# Altium PCB MASTER.PcbDoc
Units mil, origin at the board's own origin, x right, y up, seen from the top; angles counter-clockwise.
Board outline 2775.59 x 6929.09 mil, 2 copper layers (Top Layer, Bottom Layer); 51 components, 44 nets, 216 pads, 70 vias.
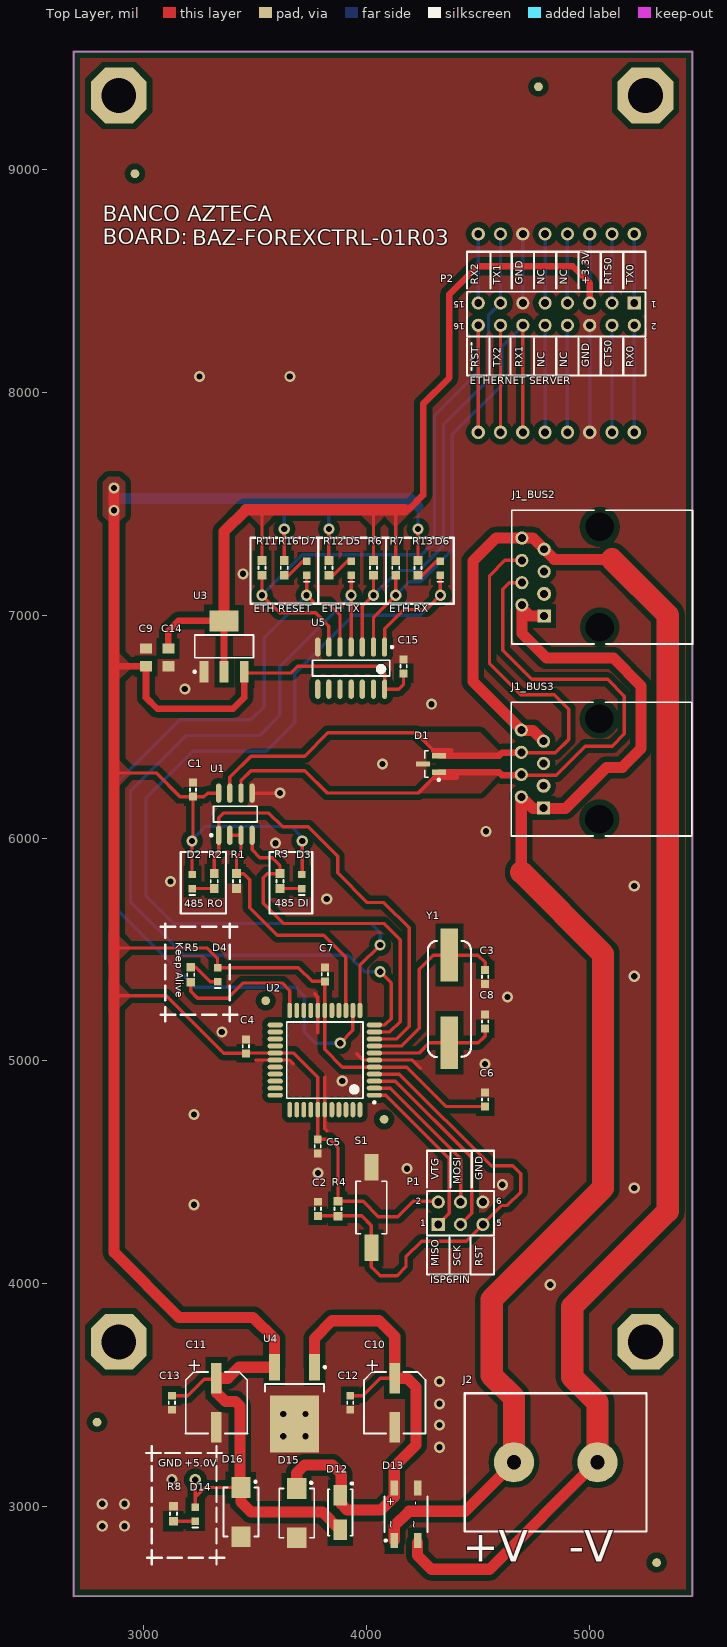
[diagram p0: Top Layer view]
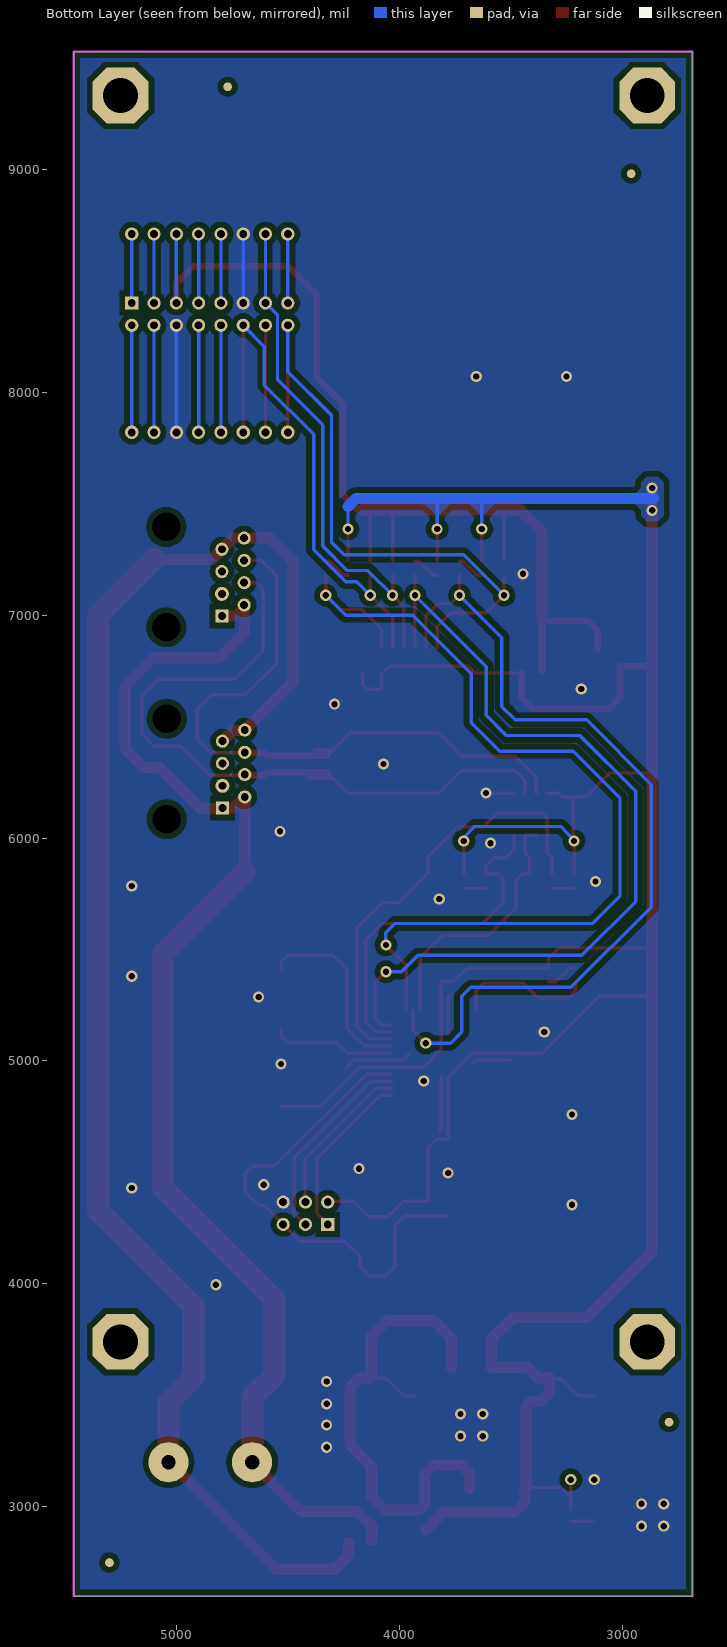
[diagram p1: Bottom Layer view, seen from below]

## Layer stack, top to bottom
Top Layer: signal copper 1.4
Dielectric: dielectric 12.6, FR-4, Dk 4.8
Bottom Layer: signal copper 1.4

## Board outline
2685.08,2598.47 2685.08,9527.56 5460.67,9527.56 5460.67,2599.94

## Design rules (kind name [scope] priority, off if disabled: settings)
Clearance [All] p1: gap=25
ComponentClearance [All] p1: gap=10 collisioncheckmode=3 verticalgap=10
PlaneConnect [All] p1: planeconnectstyle=Direct reliefexpansion=20 reliefentries=4 reliefconductorwidth=10 reliefairgap=10
PolygonConnect [All] p1: connectstyle=Direct reliefconductorwidth=10 reliefentries=4 polygonreliefangle="90 Angle"
RoomDefinition TCPIP [InComponentClass('TCPIP')] p1: confinementstyle=ConfineIn formatcopy=TRUE lockcomponents=FALSE outline 0,0 2000,0 2000,1000 0,1000
RoomDefinition SUPPLY [InComponentClass('SUPPLY')] p2: confinementstyle=ConfineIn formatcopy=TRUE lockcomponents=FALSE outline 0,0 2000,0 2000,1000 0,1000
RoomDefinition POWER [InComponentClass('POWER')] p3: confinementstyle=ConfineIn formatcopy=TRUE lockcomponents=FALSE outline 0,0 2000,0 2000,1000 0,1000
RoomDefinition CPU [InComponentClass('CPU')] p4: confinementstyle=ConfineIn formatcopy=TRUE lockcomponents=FALSE outline 0,0 2000,0 2000,1000 0,1000
RoomDefinition COM485 [InComponentClass('COM485')] p5: confinementstyle=ConfineIn formatcopy=TRUE lockcomponents=FALSE outline 0,0 2000,0 2000,1000 0,1000
RoomDefinition BUS3 [InComponentClass('BUS3')] p6: confinementstyle=ConfineIn formatcopy=TRUE lockcomponents=FALSE outline 0,0 2000,0 2000,1000 0,1000
RoomDefinition BUS2 [InComponentClass('BUS2')] p7: confinementstyle=ConfineIn formatcopy=TRUE lockcomponents=FALSE outline 0,0 2000,0 2000,1000 0,1000
RoutingVias [All] p1: holewidth=28 width=50 viastyle="Through Hole" minholewidth=28 minwidth=50 maxholewidth=28 maxwidth=50
SolderMaskExpansion [All] p1: expansion=4
TestPointUsage [All] p1: valid=0 allowmultiple=FALSE
Testpoint [All] p1: side=15 testpointundercomponent=TRUE minsize=40 maxsize=100 preferedsize=60 minholesize=0 maxholesize=40 preferedholesize=32 testpointgrid=1 style=1023 order=0-112345678
Width [All] p1: maxlimit=100 minlimit=15 preferedwidth=25
17 further rules are at their usual default settings.

## Classes and differential pairs
component class POWER: J2
component class BUS2: J1_BUS2
component class BUS3: J1_BUS3
component class COM485: C1 D1 D2 D3 R1 R2 R3 U1
component class CPU: C2 C3 C4 C5 C6 C7 C8 D4 P1 R4 R5 S1 U2 Y1
component class SUPPLY: C10 C11 C12 C13 D12 D13 D14 D15 D16 R8 U4
component class TCPIP: C9 C14 C15 D5 D6 D7 P2 R6 R7 R11 R12 R13 R16 U3 U5
channel class BUSConnector: BUS2 BUS3

## Components (designator, comment, footprint, x,y, rotation, side; value= is the part's Value field where it differs from the comment)
C1 "CAP0.1uF" CAP0603 3220.71,6217.05 r90 top
C2 "CAP0.1uF" CAP0603 3780.71,4337.05 r90 top
C3 "CAP18pF" CAP0603 4530.71,5377.05 r270 top
C4 "CAP0.1uF" CAP0603 3457.64,5065.67 r90 top
C5 "CAP0.1uF" CAP0603 3780.31,4617.05 r270 top
C6 "CAP0.1uF" CAP0603 4530.71,4827.05 r90 top
C7 "CAP0.1uF" CAP0603 3811.81,5388.54 r90 top
C8 "CAP18pF" CAP0603 4530.71,5177.05 r90 top
C9 "CAP10uF" CAP0805 3010,6810 r90 top
C10 "CAP100uF" EEH-ZA1E101XP 4125.71,3467.05 r270 top
C11 "CAP47uF" EEH-ZA1E101XP 3325.71,3467.05 r270 top
C12 "CAP0.1uF" CAP0603 3925.71,3467.05 r270 top
C13 "CAP0.1uF" CAP0603 3125.71,3467.05 r270 top
C14 "CAP22uF" CAP0805 3110,6810 r270 top
C15 "CAP0.1uF" CAP0603 4165,6770 r90 top
D1 "SM712-02HTG" SW712 4287.87,6332.05 r180 top
D2 "LEDY" 150060YS75000 3217.68,5805.08 r90 top
D3 "LEDY" 150060YS75000 3708.74,5805.08 r90 top
D4 "LEDY" 150060YS75000 3330.71,5387.05 r90 top
D5 "LEDY" 150060YS75000 3930,7210.16 r90 top
D6 "LEDY" 150060YS75000 4330,7210.16 r90 top
D7 "LEDY" 150060YS75000 3730,7210.16 r90 top
D12 "S1M-E3/5AT" S1M-E3/5AT 3880.71,2974.8 r270 top
D13 "MB6S-E3/80" MB6S-E3/80 4175.71,2967.05 r90 top
D14 "LEDY" 150060YS75000 3230.71,2967.05 r90 top
D15 "TVS12V" SMBJ5.0A 3685.71,2972.05 r270 top
D16 "TVS5.0V" SMBJ5.0A 3435.71,2976.81 r270 top
J1_BUS2 "RJ45" 15-43-6233 5460.71,7170.43 r90 top (schematic designator J1)
J1_BUS3 "RJ45" 15-43-6233 5458.17,6309.55 r90 top (schematic designator J1)
J2 "NC6-P107-02" BARRIER2POS 4660,3200 r0 top
P1 "ISP" HDR2X3 4320.71,4267.05 r0 top
P2 "826925-8" HDR2X8 5200,8400 r180 top
R1 "RES4.7K" RES0603 3415.71,5807.05 r270 top
R2 "RES4.7K" RES0603 3315.71,5807.05 r90 top
R3 "RES4.7K" RES0603 3610.71,5807.05 r90 top
R4 "RES4.7K" RES0603 3870.71,4337.05 r90 top
R5 "RES4.7K" RES0603 3210.71,5387.05 r90 top
R6 "RES4.7K" RES0603 4030,7212.13 r270 top
R7 "RES4.7K" RES0603 4130,7212.13 r270 top
R8 "RES4.7K" RES0603 3132.68,2969.01 r90 top
R11 "RES4.7K" RES0603 3530,7212.13 r270 top
R12 "RES4.7K" RES0603 3830,7211.87 r270 top
R13 "RES4.7K" RES0603 4230,7212.13 r270 top
R16 "RES4.7K" RES0603 3630,7212.13 r270 top
S1 "SW-PB" microswitch 4020.71,4342.76 r90 top
U1 "MAX485CSA" NSO8_N 3410.71,6107.05 r90 top
U2 "ATmega1284P-AU" 44A_N 3811.81,5004.09 r180 top
U3 "AZ1117H-3.3TRE1" AZ1117H-3.3TRE1 3360,6860 r90 top
U4 "MC7805CDTRKG" MC7805CDTRKG 3675.71,3467.05 r270 top
U5 "SN7407DR" SOIC14 3930,6762.13 r270 top
Y1 "XTAL" Crystal20MHz 4370.71,5278.9 r90 top

## Footprints (in the part's own frame and the unit in brackets; to place one, negate y for a bottom-side part, rotate by r counter-clockwise, add the part's x,y. Pads: shape width x height; smd on the part's side, far side on the other; paste and mask are expansions set on the pad)
15-43-6233 [mm] "Connector; PCB Jack, Thru-Hole; 1-Port; Unshielded without Lightpipes; Right Angle"
  rect 1.5x1.5 hole 0.9: 1(-4.445,16.89)
  round 1.5 hole 0.9: 2(-3.175,19.43) 4(-0.635,19.43) 5(0.635,16.89) 6(1.905,19.43) 7(3.175,16.89) 8(4.445,19.43)
  round 1.6 hole 0.9: 3(-1.905,16.89)
  round 2.95 hole 3.25 unplated: MH1(-5.715,10.54) MH2(5.715,10.54)
  silkscreen extent -7.62,0 7.62,20.58
44A_N [mm] "Thin QFP, 44-Leads, Body 10x10mm, Pitch 0.8mm, IPC Medium Density"
  oval 1.75x0.55 smd: 1(-5.65,4) 2(-5.65,3.2) 3(-5.65,2.4) 4(-5.65,1.6) 5(-5.65,0.8) 6(-5.65,0) 7(-5.65,-0.8) 8(-5.65,-1.6) 9(-5.65,-2.4) 10(-5.65,-3.2) 11(-5.65,-4) 23(5.65,-4) 24(5.65,-3.2) 25(5.65,-2.4) 26(5.65,-1.6) 27(5.65,-0.8) 28(5.65,0) 29(5.65,0.8) 30(5.65,1.6) 31(5.65,2.4) 32(5.65,3.2) 33(5.65,4)
  oval 0.55x1.75 smd: 12(-4,-5.65) 13(-3.2,-5.65) 14(-2.4,-5.65) 15(-1.6,-5.65) 16(-0.8,-5.65) 17(0,-5.65) 18(0.8,-5.65) 19(1.6,-5.65) 20(2.4,-5.65) 21(3.2,-5.65) 22(4,-5.65) 34(4,5.65) 35(3.2,5.65) 36(2.4,5.65) 37(1.6,5.65) 38(0.8,5.65) 39(0,5.65) 40(-0.8,5.65) 41(-1.6,5.65) 42(-2.4,5.65) 43(-3.2,5.65) 44(-4,5.65)
  silkscreen extent -5.77,-4.35 4.35,4.95, body extent -5,-5 5,5, height 1.2
150060YS75000 [mm]
  rect 0.85x0.85 smd: 1(-0.8,0) 2(0.8,0)
  silkscreen extent -1.53,-0.33 -1.53,0.33, body extent -0.85,-0.45 0.85,0.45, height 2.44
AZ1117H-3.3TRE1 [mm] "Reguladores de tensión lineal LDO BJT HiCurr 3.3V at 1A"
  rect 2.4x1 smd: 1(-2.9,2.3) 2(-2.9,0) 3(-2.9,-2.3)
  rect 2.4x3.3 smd: 4(2.9,0)
  silkscreen extent -3.02,-3.35 1.3,3.47, body extent -1.85,-3.35 1.85,3.35, height 1.8
BARRIER2POS [mil]
  round 180 hole 63.94: 1(0,0) 2(375,0)
  silkscreen extent -220,-310 595,310
CAP0603 [mm] "Capacitores cerámicos de capas múltiples (MLCC) - SMD/SMT 0603 0.1uF 16volts X7R 5%"
  rect 0.9x0.9 smd: 1(-0.8,0) 2(0.8,0)
  silkscreen extent -0.15,-0.35 0.15,0.35, body extent -0.83,-0.43 0.82,0.42, height 0.85
CAP0805 [mm]
  rect 1.15x1.35 smd: 1(-1,0) 2(1,0)
  body extent -1,-0.63 1,0.63, height 4.57
Crystal20MHz [mm]
  rect 6x2 smd: 1(-5,0) 2(5,0)
  silkscreen extent -6.64,-2.45 6.6,2.45, body extent -6.6,-2.4 6.6,2.4, height 4.3
EEH-ZA1E101XP [mm] "EEH-ZA1E101XP"
  rect 3.5x1.2 smd: 1(-2.794,0) 2(2.794,0)
  silkscreen extent -3.5,-3.5 3.5,3.5
HDR2X3 [mm] "Connector; Header; 3x2 Position"
  rect 1.5x1.5 hole 0.9: 1(0,0)
  round 1.5 hole 0.9: 2(0,2.54) 3(2.54,0) 4(2.54,2.54) 5(5.08,0) 6(5.08,2.54)
  silkscreen extent -1.27,-1.27 6.35,3.81
HDR2X8 [mm] "Connector; Header; 8x2 Position"
  rect 1.5x1.5 hole 0.9: 1(0,0)
  round 1.5 hole 0.9: 2(0,2.54) 3(2.54,0) 4(2.54,2.54) 5(5.08,0) 6(5.08,2.54) 7(7.62,0) 8(7.62,2.54) 9(10.16,0) 10(10.16,2.54) 11(12.7,0) 12(12.7,2.54) 13(15.24,0) 14(15.24,2.54) 15(17.78,0) 16(17.78,2.54)
  silkscreen extent -1.27,-1.27 19.05,3.81
MB6S-E3/80 [mm] "MB6S-E3/80"
  rect 1.7x0.85 smd: 1(-3,1.335) 2(-3,-1.335) 3(3,-1.335) 4(3,1.335)
  silkscreen extent -3.12,-2.45 2.05,2.45, body extent -2.05,-2.47 2.05,2.48, height 2.9
MC7805CDTRKG [mm] "MC7805CDTRKG"
  rect 3.05x1.25 smd: 1(-4.05,2.29) 3(-4.05,-2.29)
  rect 6.5x5.55 smd: 4(2.4,0)
  silkscreen extent -4.17,-3.35 -1.25,3.59, body extent -2.5,-3.37 3.72,3.37, height 2.38
microswitch [mm]
  rect 3x1.6 smd: 1(-4.59,0) 2(4.59,0)
  silkscreen extent -3,-1.75 3,1.75, body extent -3,-1.75 3,1.75, height 4.57
NSO8_N [mm] "SOIC, 8-Leads, Body 4.9x3.9mm, Pitch 1.27mm, IPC Medium Density"
  oval 2.2x0.6 smd: 1(-2.4,1.905) 2(-2.4,0.635) 3(-2.4,-0.635) 4(-2.4,-1.905) 5(2.4,-1.905) 6(2.4,-0.635) 7(2.4,0.635) 8(2.4,1.905)
  silkscreen extent -2.52,-2.5 0.9,2.88, body extent -1.95,-2.45 1.95,2.45, height 1.75
RES0603 [mm]
  rect 1x1 smd: 1(-0.85,0) 2(0.85,0)
  silkscreen extent -0.15,-0.4 0.15,0.4, body extent -0.9,-0.45 0.9,0.45, height 0.55
S1M-E3/5AT [mm] "S1M-E3/5AT"
  rect 2.35x1.55 smd: 1(-1.975,0) 2(1.975,0)
  silkscreen extent -3.42,-1.4 2.65,1.45, body extent -2.64,-1.4 2.64,1.39, height 2.29
SMBJ5.0A [mm]
  rect 2.35x2.2 smd: 1(-2.8,0) 2(2.8,0)
  silkscreen extent -3.57,-2 2.8,2, body extent -2.8,-1.97 2.79,1.97, height 2.44
SOIC14 [mm]
  oval 2.2x0.6 smd: 1(-2.4,3.81) 2(-2.4,2.54) 3(-2.4,1.27) 4(-2.4,0) 5(-2.4,-1.27) 6(-2.4,-2.54) 7(-2.4,-3.81) 8(2.4,-3.81) 9(2.4,-2.54) 10(2.4,-1.27) 11(2.4,0) 12(2.4,1.27) 13(2.4,2.54) 14(2.4,3.81)
  silkscreen extent -2.52,-4.4 0.9,4.79, body extent -2,-4.38 2,4.38, height 1.75
SW712 [mm] "SM712 Series 600W Asymmetrical TVS Diode Array"
  rect 1.6x0.6 smd: 1(-0.9,0.95) 2(-0.9,-0.95) 3(0.9,0)
  silkscreen extent -1.03,-1.5 0.7,1.92, body extent -0.7,-1.52 0.7,1.52, height 1.12

## Part data
C1 C2 C4 C5 C6 C7 C12 C13 C15: library part C0.1UF, "Capacitores cerámicos de capas múltiples (MLCC) - SMD/SMT 0603 0.1uF 16volts X7R 5%"
C3 C8: "Capacitores cerámicos de capas múltiples (MLCC) - SMD/SMT 0603 18pF 50volts C0G 5%"
C9: "Capacitores cerámicos de capas múltiples (MLCC) - SMD/SMT 0805 10uF 16volts X5R 10%"
C10: "Capacitores de polímero orgánico de aluminio 100uF 25volts 6.3x7.7mm"
C11: "Capacitores de polímero orgánico de aluminio 25volts 47uF ESR 30mohm"
C14: "Capacitores cerámicos de capas múltiples (MLCC) - SMD/SMT 0805 22uF 16volts X5R 20%"
D1: "Secuencias de diodos de TVS 600W 2 Channel Green Asymmetrical SOT23-3 (- 7 V to + 12 V)"
D2 D3 D4 D5 D6 D7 D14: "LED estándar - SMD (montaje superficial) WL-SMCW SMDMono TpVw Waterclr 0603 Yellow"
D12: "Rectificadores 1.0 Amp 1000 Volt 30A IFSM @ 8.3ms"
D13: "Rectificadores en puente 600 Volt 0.5 Amp 35 Amp IFSM"
D15: "Diodos TVS - Supresores de tensión transitoria 600W 12V 5% Uni"
D16: "Diodos TVS - Supresores de tensión transitoria 5Vr 600W 65.3A 5% UniDirectional"
J1_BUS2 J1_BUS3: library part 15-43-6233, "Conectores modulares / Conectores Ethernet 8 PCB LO PRO R/A"
J2: "Bloques de terminal de barrera DUAL .375\" 2P 12-22"
P1: library part "Header 3X2", "Alojamientos de cables y cabecera 2X03P DUAL ROW"
P2: library part "Header 8X2", "Alojamientos de cables y cabecera 2X08 POS VERT TIN"
R1 R2 R3 R4 R5 R6 R7 R8 R11 R12 R13 R16: "Resistores de película gruesa - SMD 1/10watt 4.7Kohms 1%"
S1: "Switch"
U1: "Low-Power, Slew-Rate-Limited RS-485/RS-422 Transceiver"
U2: "20 MHz 8-bit AVR Microcontroller with 128KB Flash, 44-Pin TQFP Pkg, Industrial Temp"
U3: "Reguladores de tensión lineal LDO BJT HiCurr 1.15V at 1A"
U4: "Reguladores de tensión lineal 5V 1A Postive"
U5: "Búfers y controladores de línea Hex Buffer/Driver"
Y1: "Cristales 20MHz 16pF -10C +70C"

## Free pads (board coordinates)
  oct 250x250 hole 156.25: 0(2887.8,3740.16) 0(2887.8,9330.71) 0(5250,3740.16) 0(5250,9330.71)
  round 39.37 smd mask+39.37: 1(2790,3380) 1(2960,8980) 1(4770,9370) 1(5300,2750)
  round 39.37 smd far side mask+39.37: 1(2790,3380) 1(2960,8980) 1(4770,9370) 1(5300,2750)
  round 39.37 smd mask+29.53: 1(3546.69,5270.04) 1(4077.72,4738.03)

## Via types
v1: diameter 50, hole 28, Top Layer to Bottom Layer, 54 vias
v2: diameter 59.05, hole 35.43, Top Layer to Bottom Layer, 16 vias

## Nets (pads, with @x,y where several pads share a name; then routed paths per layer and width w, separated by ;. In a path a pad name is that pad's centre, name@x,y a point inside that pad or via, vN(x,y) a via of type N, cw(c..) or ccw(c..) an arc to the next point about the centre after c; other vN are vias at no path point)
20MHZ_1: C3.1 U2.8 Y1.2 | length 866.9
  Top Layer w15: U2.8 4155.75,5067.09 4235.71,5147.05 4235.71,5412.05 4297.56,5473.9 4498.86,5473.9 4530.71,5442.05 C3.1
20MHZ_2: C8.1 U2.7 Y1.1 | length 561.6
  Top Layer w15: U2.7 4234.25,5035.59 4280.71,5082.05 Y1.1 4500.71,5082.05 4530.71,5112.05 C8.1
+3.3V: C14.1 P2.5 R6.1 R7.1 R11.1 U3.2 U3.4 | length 4677
  Top Layer w15: R11.1 3530,7472.43 ; R6.1 4030,7472.43 ; R7.1 4130,7472.43
  Top Layer w30: C14.1 3110,6930 3154.17,6974.17 U3.4 U3.2 ; 4169,7475 4190,7475 4253,7538 4253,7947 4370.08,8064.08 4370.08,8438.08 4497,8565 4924,8565 5000,8489 P2.5
  Top Layer w50: U3.4 3360,7375 3457.43,7472.43 4166.43,7472.43
  Bottom Layer w15: P2.5 v2(5000,8710)
A: D1.1 J1_BUS2.4 J1_BUS3.4 U1.6 | length 3210.3
  Top Layer w15: U1.6 3435.71,6257.05 3480.71,6302.05 3722.87,6302.05 3822.87,6202.05 4230.71,6202.05 D1.1 ; J1_BUS2.4@4683.54,7145.43 4639.09,7145.43 4610.71,7117.05 4610.71,6842.05 4740.71,6712.05 5080.71,6712.05 5155.71,6637.05 5155.71,6467.05 5100.71,6412.05 4980.71,6412.05 4850.71,6282.05 J1_BUS3.4@4693.64,6282.05
  Top Layer w25: 4305.71,6272.04 4400.71,6272.04
  Top Layer w30: D1.1 4593.15,6294.65 4605.75,6282.05 J1_BUS3.4@4693.64,6282.05
B: D1.2 J1_BUS2.6 J1_BUS3.6 U1.7 | length 2920
  Top Layer w15: U1.7 3385.71,6272.05 3480.71,6367.05 3720.71,6367.05 3825.71,6472.05 4220.71,6472.05 4300.71,6392.05 ; J1_BUS2.6@4683.54,7245.43 4619.09,7245.43 4550.71,7177.05 4550.71,6782.05 4690.71,6642.05 4840.71,6642.05 4905.71,6577.05 4905.71,6442.05 4845.71,6382.05 J1_BUS3.6@4695.75,6382.05
  Top Layer w25: 4300.71,6392.05 4375.71,6392.05
  Top Layer w30: D1.2 4593.11,6369.45 4605.71,6382.05 J1_BUS3.6@4695.75,6382.05
COM_485_EN: R1.1 U1.2 U1.3 U2.14 | length 1187.1
  Top Layer w15: U1.2 U1.3 3435.71,5932.05 3415.71,5912.05 R1.1 3447.24,5840.51 3475,5812.76 3475,5687.76 3598.76,5564 3806,5564 3905.71,5464.29 U2.14@3905.71,5226.54
DI: R3.2 U1.4 U2.10 | length 1637.4
  Top Layer w15: U1.4 3485.71,5947.05 3520.71,5912.05 3575.71,5912.05 3610.71,5877.05 R3.2 3554.17,5840.51 3535.71,5822.05 3535.71,5707.05 3625.71,5617.05 4075.71,5617.05 4150,5542.76 4150,5176.34 4103.74,5130.08 U2.10
GND: C1.2 C2.2 C3.2 C4.2 C5.2 C6.2 C7.2 C8.2 C9.2 C10.2 C11.2 C12.2 C13.2 C14.2 C15.2 D1.3 D13.3 D15.2 D16.2 P1.6 P2.6 P2.11 R1.2 R8.2 S1.2 U1.5 U2.6 U2.18 U2.28 U2.39 U3.1 U4.4 U5.7 | length 1829.4
  Top Layer w15: U1.5 v1@3610.71,6201.54 ; 3500.71,5004.1 3653.66,5004.1 3670.71,4987.05 ; 3765.71,5302.05 3779.91,5287.84 3779.91,5126.25 ; 3811.81,4927.05 3811.81,4695.95 3820.71,4687.05 ; 3955.71,5032.05 3983.66,5004.1 4203.66,5004.1 4240.71,4967.05
  Bottom Layer w15: P2.11 v2(4700,8710) ; v2(5000,7820) P2.6
  other v1: 2813.39,2913.39 2913.39,2913.39 2813.39,3013.39 2913.39,3013.39 3125.71,3122.05 4325.71,3267.05 3625.71,3317.05 3725.71,3317.05 4325.71,3367.05 3625.71,3417.05 3725.71,3417.05 4325.71,3462.05 4325.71,3562.05 4822.83,3996.06 3225,4355 5200,4430 4608.11,4444.61 3780.71,4497.05 4180.71,4517.05 3225,4760 3890,4910 4530.71,4987.05 3350,5130 4630.71,5287.05 5200,5380 3820.71,5727.05 5200,5785 3120,5805 3590.71,5977.05 4535,6030 3610.71,6202.05 4070.71,6332.05 4290,6600.51 3184,6668 3445,7185 3250,8070 3655,8070
IND: R5.1 U2.22 | length 629.1
  Top Layer w15: R5.1 3210.71,5312.05 3240.71,5282.05 3377.05,5282.05 3445,5350 3620,5350 3654.33,5315.67 U2.22
MISO: P1.4 U2.2 | length 715.4
  Top Layer w15: U2.2 4104.64,4878.11 4422.28,4560.47 P1.4@4422.28,4364.69
MOSI: P1.1 U2.1 | length 770
  Top Layer w15: U2.1 4086.14,4846.62 4370.71,4562.05 4370.71,4317.05 P1.1
NetD2_1: D2.1 R2.1 | length 98
  Top Layer w15: D2.1 R2.1
NetD3_1: D3.1 R3.1 | length 98
  Top Layer w15: R3.1 D3.1
NetD4_1: D4.1 R5.2 | length 146.9
  Top Layer w15: R5.2 3232.24,5420.51 3297.2,5355.55 D4.1
NetD5_2: D5.2 R12.2 | length 126.1
  Top Layer w15: R12.2 3849.66,7178.41 3912.65,7241.4 D5.2@3930,7241.4
NetD6_2: D6.2 R13.2 | length 126.1
  Top Layer w15: R13.2 4249.66,7178.66 4312.65,7241.65 D6.2
NetD7_2: D7.2 R16.2 | length 126.1
  Top Layer w15: R16.2 3649.66,7178.66 3712.65,7241.65 D7.2
NetD14_1: D14.1 R8.1 | length 98
  Top Layer w15: R8.1 D14.1
NetP2_3: P2.3 | length 310
  Bottom Layer w15: P2.3 v2(5100,8710)
NetP2_4: P2.4 | length 480
  Bottom Layer w15: v2(5100,7820) P2.4
NetP2_7: P2.7 | length 310
  Bottom Layer w15: P2.7 v2(4900,8710)
NetP2_8: P2.8 | length 480
  Bottom Layer w15: v2(4900,7820) P2.8
NetP2_9: P2.9 | length 310
  Bottom Layer w15: P2.9 v2(4800,8710)
NetP2_10: P2.10 | length 480
  Bottom Layer w15: v2(4800,7820) P2.10
NetP2_14: P2.14 | length 480
  Top Layer w15: v2(4600,7820) P2.14
NetP2_15: P2.15 | length 310
  Bottom Layer w15: P2.15 v2(4500,8710)
PIN_A: U2.30
PIN_B: U2.31
PIN_C: U2.32
PIN_D: U2.33
POWER_OUT: C10.1 C12.1 D12.1 D13.4 D15.1 U4.1 | length 2319.2
  Top Layer w15: C12.1 3982.2,3498.54 4060.71,3577.05 C10.1
  Top Layer w50: D15.1 3685.71,3152.05 3720.71,3187.05 3845.71,3187.05 3885.71,3147.05 3885.71,3012.05 3912.2,2985.55 4064.21,2985.55 4123.15,3044.49 4123.15,3179.49 4220.71,3277.05 4220.71,3537.05 4180.71,3577.05 C10.1 ; U4.1 3765.83,3755.76 3845.02,3835 4055,3835 4125.71,3764.29 C10.1@4125.71,3582.05
POWER_V+: D13.1 J1_BUS2.1 J1_BUS2.2 J1_BUS3.1 J1_BUS3.2 J2.1 | length 5928.3
  Top Layer w50: D13.1@4123.15,2848.94 4123.15,2913.15 4190,2980 4440,2980 J2.1 ; 4693.21,5846.79 J1_BUS3.2 ; J1_BUS3.2@4695.71,6182.05 4745.71,6132.05 4890.71,6132.05 5075.71,6317.05 5145.71,6317.05 5230.71,6402.05 5230.71,6682.05 5105.71,6807.05 4805.71,6807.05 4695.75,6917.01 J1_BUS2.2 ; J1_BUS2.2@4695.75,7032.01 4732.32,6995.43 J1_BUS2.1
  Top Layer w100: J2.1 4660,3489.61 4560,3589.61 4560,3930 5060,4430 5060,5480 4693.21,5846.79
POWER_V-: D13.2 J1_BUS2.7 J1_BUS2.8 J1_BUS3.7 J1_BUS3.8 J2.2 | length 7144.8
  Top Layer w50: D13.2@4228.27,2838.94 4228.27,2781.73 4290,2720 4550,2720 J2.2@5032.5,3202.5 ; J1_BUS2.8 J1_BUS2.8@4699.13,7342.05 ; J1_BUS3.7 4745.71,6482.05 4695.75,6482.05 4475.71,6702.09 4475.71,7242.05 4579.09,7345.43 4745.75,7345.43 4841.18,7250 5100,7250
  Top Layer w100: J2.2 5035,3468.94 4921.26,3582.68 4921.26,3897.64 5350,4326.38 5350,7000 5100,7250
RCK: U2.37
RESET_A: D7.1 U2.13 U5.5 | length 3890.1
  Top Layer w15: D7.1 v1(3730,7089.25) 3730.75,7089.25 3768.06,7051.94 3828.06,7051.94 3880,7000 U5.5 ; v1(3881,5080) 3937.79,5136.79 U2.13
  Bottom Layer w15: v1(3730,7089.25) 3540,6899.25 3540,6590 3480,6530 3160,6530 2870,6240 2870,5690 3230,5330 3680,5330 3720,5290 3720,5130 3770,5080 v1(3881,5080)
RESET_Y: P2.16 R11.2 U5.6 | length 2947.1
  Top Layer w15: R11.2 v1(3530,7089.25) 3609.25,7010 3770,7010 3830,6950 U5.6 ; v2(4500,7820) P2.16
  Bottom Layer w15: v1(3530,7089.25) 3710.75,7270 4247,7270 4304,7327 4304,7896.14 4500,8092.14 P2.16
RO: R2.2 U1.1 U2.9 | length 2000.4
  Top Layer w15: R2.2 3315.71,5917.05 3335.71,5937.05 3335.71,6092.05 3355.71,6112.05 3560.71,6112.05 3622.76,6050 3737.76,6050 3869.46,5918.3 3869.46,5843.3 4001.96,5710.8 4076.96,5710.8 4190,5597.76 4190,5156.34 4132.24,5098.58 U2.9
RST: C2.1 P1.5 R4.1 S1.1 U2.4 | length 2240.6
  Top Layer w15: C2.1 3977.21,4305.55 4020.71,4262.05 S1.1@4020.71,4156.34 ; S1.1 4020.71,4077.05 4060.71,4037.05 4135.71,4037.05 4175.71,4077.05 4175.71,4122.05 4245.71,4192.05 4445.71,4192.05 4605.71,4352.05 4630.71,4352.05 4690.71,4412.05 4690.71,4494.05 4654.71,4530.05 4557.71,4530.05 4146.65,4941.1 U2.4
SCK: P1.3 U2.3 | length 899.1
  Top Layer w15: U2.3 4128.15,4909.61 4470.71,4567.05 4470.71,4317.05 P1.3
UART0_RX_A: D6.1 U2.12 U5.1 | length 4254.2
  Top Layer w15: U2.12 3969.29,5429.29 v1(4060,5520) ; U5.1 4080,6939.25 4165.75,7025 4265.75,7025 v1(4330,7089.25) D6.1
  Bottom Layer w15: v1(4060,5520) 4060,5575.21 4018.16,5617.05 3132.95,5617.05 3010,5740 3010,6180 3220,6390 3550,6390 3677.5,6517.5 3677.5,6737.5 3940,7000 4240.75,7000 v1(4330,7089.25)
UART0_RX_Y: P2.12 R7.2 U5.2 | length 2320.2
  Top Layer w15: U5.2 4030,6989.25 v1(4130,7089.25) R7.2 ; v2(4700,7820) P2.12
  Bottom Layer w15: v1(4130,7089.25) 4190.75,7150 4241,7150 4384,7293 4384,7811 4605,8032 4605,8204 P2.12@4701,8300
UART0_TX_A: P2.13 R6.2 U5.3 | length 2254.2
  Top Layer w15: U5.3 3980,7039.25 v1(4030,7089.25) R6.2
  Bottom Layer w15: v1(4030,7089.25) 4140.75,7200 4234,7200 4344,7310 4344,7853 4546,8055 4546,8346 P2.13 v2(4600,8710)
UART0_TX_Y: D5.1 U2.11 U5.4 | length 3868.2
  Top Layer w15: U5.4 D5.1 ; U2.11 4081.57,5161.57 4110,5190 4110,5350 v1(4060,5400)
  Bottom Layer w15: v1(3930,7089.25) 3610,6769.25 3610,6550 3520,6460 3190,6460 2940,6210 2940,5715.31 3181.31,5474 3916,5474 3990,5400 v1(4060,5400)
VCC: C1.1 C4.1 C5.1 C6.1 C7.1 C9.1 C11.1 C13.1 C15.1 D2.2 D3.2 D4.2 D12.2 D14.2 D16.1 P1.2 R4.2 R12.1 R13.1 R16.1 U1.8 U2.5 U2.17 U2.27 U2.38 U3.3 U4.3 U5.14 | length 16285.8
  Top Layer w15: 2865.71,5507.05 3282.95,5507.05 3330.71,5459.29 D4.2 3693.21,5418.54 3754.71,5357.05 C7.1 U2.17 ; 2865.71,6292.05 3055.71,6292.05 3162.2,6185.55 3269.73,6185.55 3285.71,6201.54 U1.8 ; 2870.71,5292.05 3100.71,5292.05 3358.58,5034.17 C4.1 ; C13.1 3197.2,3498.54 3270.71,3572.05 C11.1@3325.71,3572.05 ; D2.2@3215.71,5838.54 v1(3215.71,5987.05) ; v1@3220.71,5992.05 C1.1 ; D14.2@3230.71,2992.05 3230.71,3042.05 3275.71,3087.05 D16.1 ; D14.2 v1(3230.71,3122.05) ; U3.3@3450.55,6740 3660,6740 3690,6770 4040,6770 ; C4.1@3457.64,5035.59 3672.16,5035.59 3780.71,4927.05 U2.38@3780.71,4781.65 ; R16.1 v1(3630,7386) ; D3.2@3710.71,5838.54 v1(3710.71,5987.05) ; C5.1 U2.38 ; C5.1@3780.71,4648.54 3834.21,4648.54 3870.71,4612.05 R4.2 3983.21,4370.51 4051.67,4302.05 4139.75,4302.05 4208.21,4370.51 P1.2@4320.71,4370.51 ; U2.17@3811.26,5232.05 3811.26,5051.74 3890.95,4972.05 U2.5@4040.71,4972.05 ; R12.1 v1(3830,7385.75) ; U2.5 4180.16,4972.6 4357.2,4795.55 C6.1 ; 4045,6770 4080,6735 U5.14 4142.64,6667.64 4165,6690 C15.1 ; R13.1 v1(4230,7386)
  Top Layer w30: 2890.63,6770.63 C9.1 3010,6630 3060,6580 3400,6580 3450.55,6630.55 U3.3@3450.55,6740
  Top Layer w50: v1(2865.71,7570) 2865.71,4142.17 3157.87,3850 3490,3850 3585.71,3754.29 U4.3@3585.71,3637.05 ; D16.1@3430.71,3082.05 3430.71,3452.05 3410.71,3472.05 3365.71,3472.05 3325.71,3512.05 C11.1 3376.81,3577.05 3426.26,3626.5 U4.3 ; D16.1@3435.71,3077.05 3435.71,3022.05 3480.71,2977.05 3800.71,2977.05 D12.2
  Bottom Layer w15: v1(3215.71,5987.05) 3275.71,6052.05 3660.71,6052.05 3710.71,6002.05 v1(3710.71,5987.05) ; v1(3630,7386) 3630,7523.43 ; v1(3830,7385.75) 3830,7523.18 ; v1(4230,7386) 4230,7487
  Bottom Layer w50: 2859,7523.43 4193.57,7523.43 4230,7487
  other v1: 2865.71,7470
pads on no net: J1_BUS2.3 J1_BUS2.5 J1_BUS2.MH1 J1_BUS2.MH2 J1_BUS3.3 J1_BUS3.5 J1_BUS3.MH1 J1_BUS3.MH2 P2.1 P2.2 U2.15 U2.16 U2.19 U2.20 U2.21 U2.23 U2.24 U2.25 U2.26 U2.29 U2.34 U2.35 U2.36 U2.40 U2.41 U2.42 U2.43 U2.44 U5.8 U5.9 U5.10 U5.11 U5.12 U5.13
copper on no net: | length 790
  Bottom Layer w15: v2(5200,7820) 5200,8300 ; 5200,8400 v2(5200,8710)

## Polygon pours and split planes (outlines as drawn)
VCC on Top Layer "Top Layer-No Net" (solid, pour order 1007): 2915.71,7595 2890.71,7620 2840.71,7620 2815.71,7595 2815.71,7445 2840.71,7420 2890.71,7420 2915.71,7445
+3.3V on Top Layer "Top Layer-No Net" (solid, pour order 1015): 3530.19,7395 3528.19,7395 3426.19,7497 3634.19,7497
+3.3V on Top Layer "Top Layer-No Net" (solid, pour order 1015): 4130.19,7395 4128.19,7395 4026.19,7497 4234.19,7497
+3.3V on Top Layer "Top Layer-No Net" (solid, pour order 1015): 4030.19,7395 4028.19,7395 3926.19,7497 4134.19,7497
VCC on Top Layer "Top Layer-No Net" (solid, pour order 1015): 2947,6770 2947,6768 2845,6666 2845,6874
B on Top Layer "Top Layer-No Net" (solid, pour order 1000): 4323.31,6369.45 4613.31,6369.45 4508.31,6474.45 4218.31,6474.45
A on Top Layer "Top Layer-No Net" (solid, pour order 1001): 4230.71,6202.05 4323.31,6294.65 4603.31,6294.65 4605.71,6297.05 4510.71,6202.05
VCC on Top Layer "Top Layer-No Net" (solid, pour order 1015): 2945.71,6292.05 2945.71,6290.05 2843.71,6188.05 2843.71,6396.05
VCC on Top Layer "Top Layer-No Net" (solid, pour order 1015): 2942.71,5507.05 2942.71,5505.05 2840.71,5403.05 2840.71,5611.05
VCC on Top Layer "Top Layer-No Net" (solid, pour order 1015): 2942.71,5292.05 2942.71,5290.05 2840.71,5188.05 2840.71,5396.05
GND on Top Layer "Top Layer-No Net" (solid, pour order 1000): 2685.08,2598.47 5459.2,2598.47 5460.67,2599.94 5460.67,9527.56 2685.08,9527.56
VCC on Bottom Layer "Top Layer-No Net" (solid, pour order 1000): 2964.71,7521.41 2964.71,7519.41 2862.71,7417.41 2862.71,7625.41
VCC on Bottom Layer "Top Layer-No Net" (solid, pour order 1018): 2914.71,7595 2889.71,7620 2839.71,7620 2814.71,7595 2814.71,7445 2839.71,7420 2889.71,7420 2914.71,7445
VCC on Bottom Layer "Top Layer-No Net" (solid, pour order 1015): 3830,7443.75 3828,7443.75 3726,7545.75 3934,7545.75
VCC on Bottom Layer "Top Layer-No Net" (solid, pour order 1015): 3630,7443 3628,7443 3526,7545 3734,7545
GND on Bottom Layer "Top Layer-No Net" (solid, pour order 1001): 2685.08,2598.47 5459.2,2598.47 5460.67,2599.94 5460.67,9527.56 2685.08,9527.56

## Keep-outs
Keep-Out Layer:
  lines w10: 5460.67,2599.94 5460.67,9527.56 2685.08,9527.56 2685.08,2598.47 5460.67,2599.94 ; 5460.67,2599.94 5460.67,2599.94

## Silkscreen, mask and mechanical layers (free items; w line width, h text height)
Top Overlay:
  lines w10: 3010.71,3242.05 3075.71,3242.05 ; 3015.71,2772.05 3080.71,2772.05 ; 3035.71,2742.05 3035.71,2807.05 ; 3035.71,2837.05 3035.71,2902.05 ; 3035.71,2932.05 3035.71,2997.05 ; 3035.71,3022.05 3035.71,3087.05 ; 3035.71,3117.05 3035.71,3182.05 ; 3035.71,3207.05 3035.71,3272.05 ; 3075.71,5207.05 3140.71,5207.05 ; 3075.71,5602.05 3140.71,5602.05 ; 3095.71,3242.05 3160.71,3242.05 ; 3095.71,5177.05 3095.71,5242.05 ; 3095.71,5272.05 3095.71,5337.05 ; 3095.71,5367.05 3095.71,5432.05 ; 3095.71,5457.05 3095.71,5522.05 ; 3095.71,5552.05 3095.71,5617.05 ; 3105.71,2772.05 3170.71,2772.05 ; 3165.71,5207.05 3230.71,5207.05 ; 3165.71,5602.05 3230.71,5602.05 ; 3190.71,3242.05 3255.71,3242.05 ; 3200.71,2772.05 3265.71,2772.05 ; 3260.71,5207.05 3325.71,5207.05 ; 3260.71,5602.05 3325.71,5602.05 ; 3285.71,3242.05 3350.71,3242.05 ; 3295.71,2772.05 3360.71,2772.05 ; 3325.71,2742.05 3325.71,2807.05 ; 3325.71,2837.05 3325.71,2902.05 ; 3325.71,2932.05 3325.71,2997.05 ; 3325.71,3022.05 3325.71,3087.05 ; 3325.71,3117.05 3325.71,3182.05 ; 3325.71,3207.05 3325.71,3272.05 ; 3355.71,5207.05 3420.71,5207.05 ; 3355.71,5602.05 3420.71,5602.05 ; 3385.71,5177.05 3385.71,5242.05 ; 3385.71,5272.05 3385.71,5337.05 ; 3385.71,5367.05 3385.71,5432.05 ; 3385.71,5457.05 3385.71,5522.05 ; 3385.71,5552.05 3385.71,5617.05 ; 4270.71,4207.05 4270.71,4042.05 4570.71,4042.05 4570.71,4207.05 ; 4270.71,4432.05 4270.71,4597.05 4570.71,4597.05 4570.71,4432.05 ; 4370.71,4042.05 4370.71,4207.05 ; 4375.71,4432.05 4375.71,4597.05 ; 4450,8240 4450,8075 5250,8075 5250,8240 ; 4450,8465 4450,8630 5250,8630 5250,8465 ; 4465.71,4042.05 4465.71,4207.05 ; 4470,8100 4470,8220 ; 4470.71,4432.05 4470.71,4597.05 ; 4550,8075 4550,8240 ; 4555,8465 4555,8630 ; 4645,8075 4645,8240 ; 4650,8465 4650,8630 ; 4750,8075 4750,8240 ; 4750,8465 4750,8630 ; 4850,8075 4850,8240 ; 4850,8465 4850,8630 ; 4950,8075 4950,8240 ; 4950,8465 4950,8630 ; 5050,8075 5050,8240 ; 5050,8465 5050,8630 ; 5150,8075 5150,8240 ; 5150,8465 5150,8630 ; 3782,7051 4085.97,7051 ; 3782,7051 3782,7347 ; 3782,7051 3782,7347 ; 3782,7051 3478.03,7051 3478.03,7347 3782,7347 ; 3782,7347 4085.97,7347 ; 4085.97,7051 4389.93,7051 4389.93,7347 4085.97,7347 ; 4085.97,7051 4085.97,7347 ; 4085.97,7051 4085.97,7347 ; 3165.71,5662.05 3368,5662.05 3368,5937.05 3165.71,5937.05 3165.71,5662.05 ; 3564,5662.05 3755.71,5662.05 3755.71,5937.05 3564,5937.05 3564,5662.05
  text "BANCO AZTECA" at 2815.93,8743.03 h120
  text "BOARD:" at 2815.93,8638.03 h120
  text "BAZ-FOREXCTRL-01R03" at 3216.93,8634.03 h120
  text "RX2" at 4513.5,8481 h60 r90
  text "TX1" at 4613.5,8481 h60 r90
  text "GND" at 4712,8481 h60 r90
  text "NC" at 4812,8481 h60 r90
  text "NC" at 4912,8481 h60 r90
  text "+3.3V" at 5012,8481 h60 r90
  text "RTS0" at 5112,8481 h60 r90
  text "TX0" at 5212,8481 h60 r90
  text "RST" at 4515,8112 h60 r90
  text "TX2" at 4613.5,8112 h60 r90
  text "RX1" at 4712,8112 h60 r90
  text "NC" at 4812,8112 h60 r90
  text "NC" at 4912,8112 h60 r90
  text "GND" at 5012,8112 h60 r90
  text "CTS0" at 5112,8112 h60 r90
  text "RX0" at 5212,8112 h60 r90
  text "ETHERNET SERVER" at 4463,8023 h60
  text "ETH RESET" at 3493,7000 h60
  text "ETH TX" at 3796.97,7000 h60
  text "ETH RX" at 4100.94,7000 h60
  text "485 DI" at 3587,5679 h60
  text "485 RO" at 3180.71,5677.05 h60
  text "Keep Alive" at 3130.71,5532.05 h60 r270
  text "VTG" at 4335.71,4467.53 h60 r90
  text "GND" at 4532.71,4464.02 h60 r90
  text "MOSI" at 4434.21,4448.05 h60 r90
  text "MISO" at 4335.71,4079.05 h60 r90
  text "SCK" at 4434.21,4079.05 h60 r90
  text "RST" at 4532.71,4079.05 h60 r90
  text "ISP6PIN" at 4283.71,3990.05 h60
  text "GND" at 3065.71,3167.05 h60
  text "+5.0V" at 3180.71,3167.05 h60

## Dimensions
2685.08,9527.56 to 5460.67,9527.56 on Mechanical 13
5460.67,9527.56 to 5460.67,2599.94 on Mechanical 13

## Text inside footprints (layer, text, board x,y; h text height)
C10: Top Overlay "+" at 3980.71,3667.05 h98.43 r270
C11: Top Overlay "+" at 3180.71,3667.05 h98.43 r270
D13: Top Overlay "~" at 4135.71,2902.05 h60 r90; Top Overlay "~" at 4240.71,2902.05 h60 r90; Top Overlay "+" at 4135.71,3002.05 h60 r90; Top Overlay "-" at 4245.71,3007.05 h60 r90
J2: Top Overlay "+V   -V" at 4430,2706 h240
P1: Top Overlay "6" at 4580.71,4347.05 h50; Top Overlay "5" at 4580.71,4247.05 h50; Top Overlay "2" at 4220.71,4347.05 h50; Top Overlay "1" at 4240.71,4247.05 h50
P2: Top Overlay "16" at 4440,8320 h50 r180; Top Overlay "15" at 4440,8420 h50 r180; Top Overlay "1" at 5300,8420 h50 r180; Top Overlay "2" at 5300,8320 h50 r180